# Altium PCB Layout.PcbDoc
Units mil, origin at the board's own origin, x right, y up, seen from the top; angles counter-clockwise.
Board outline 3000 x 3500 mil, 4 copper layers (Top Layer, Int1 (GND), Int2 (GND), Bottom Layer), stack 43.712 mil thick; 44 components, 33 nets, 161 pads, 35 vias.
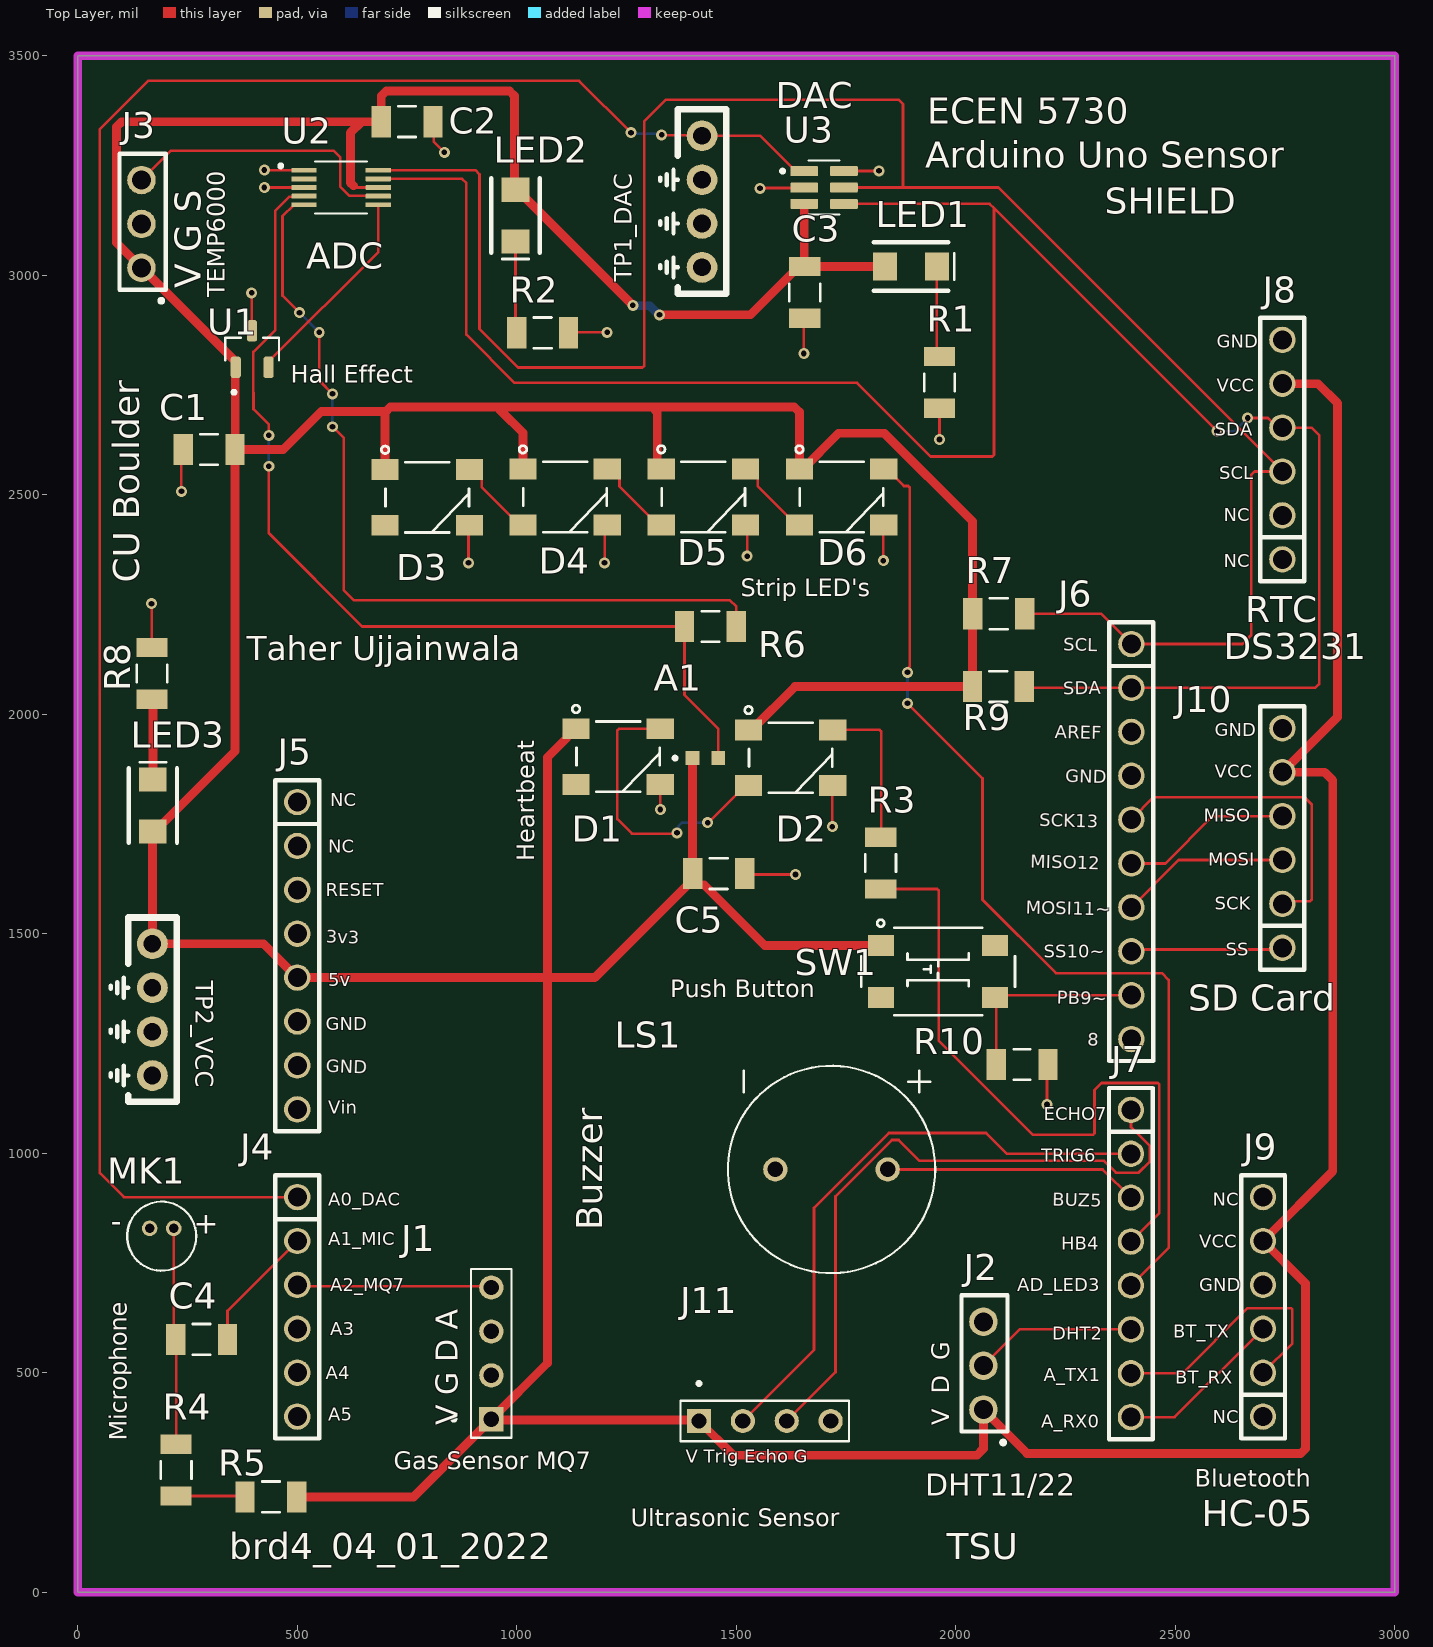
[diagram p0: Top Layer view]
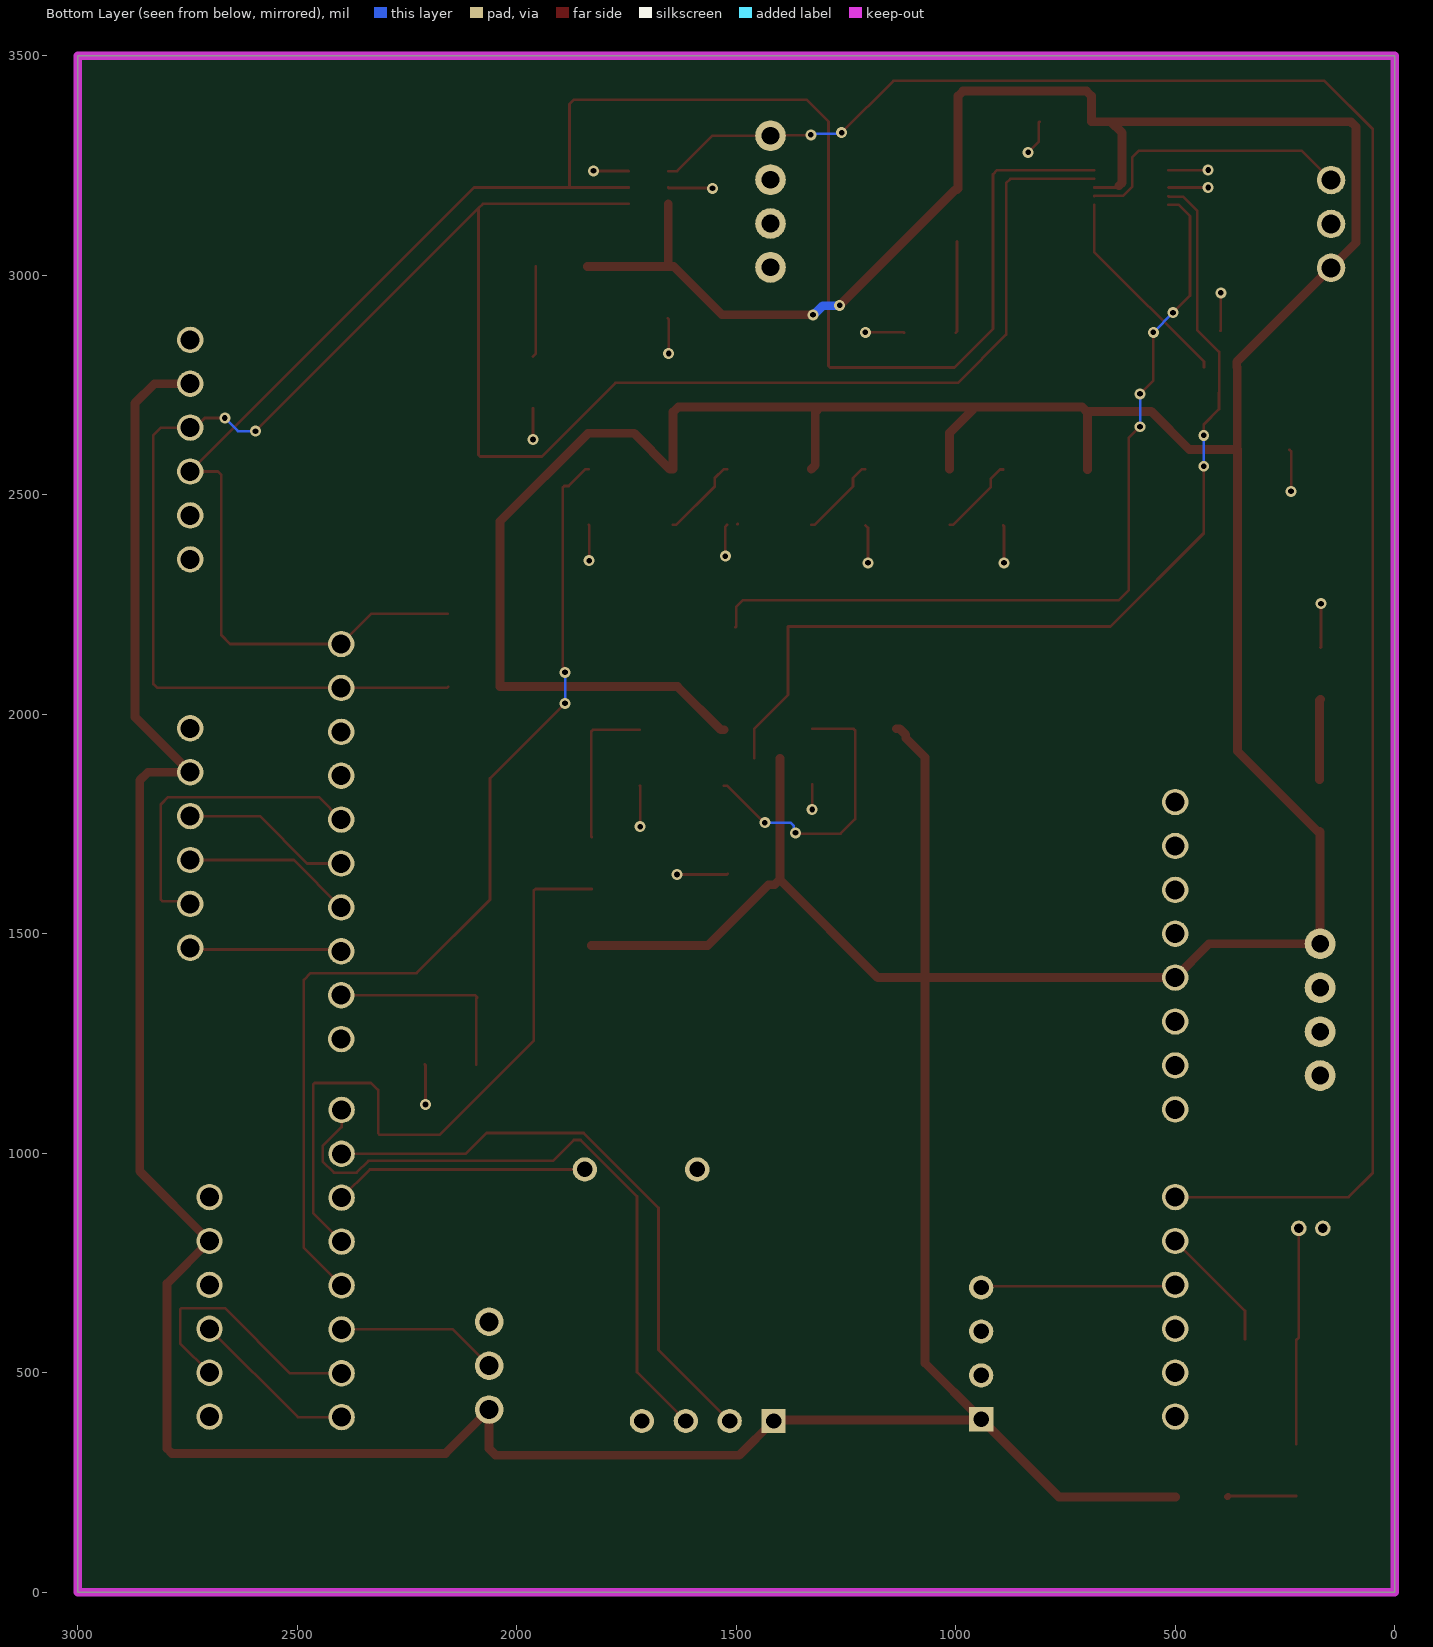
[diagram p1: Bottom Layer view, seen from below]
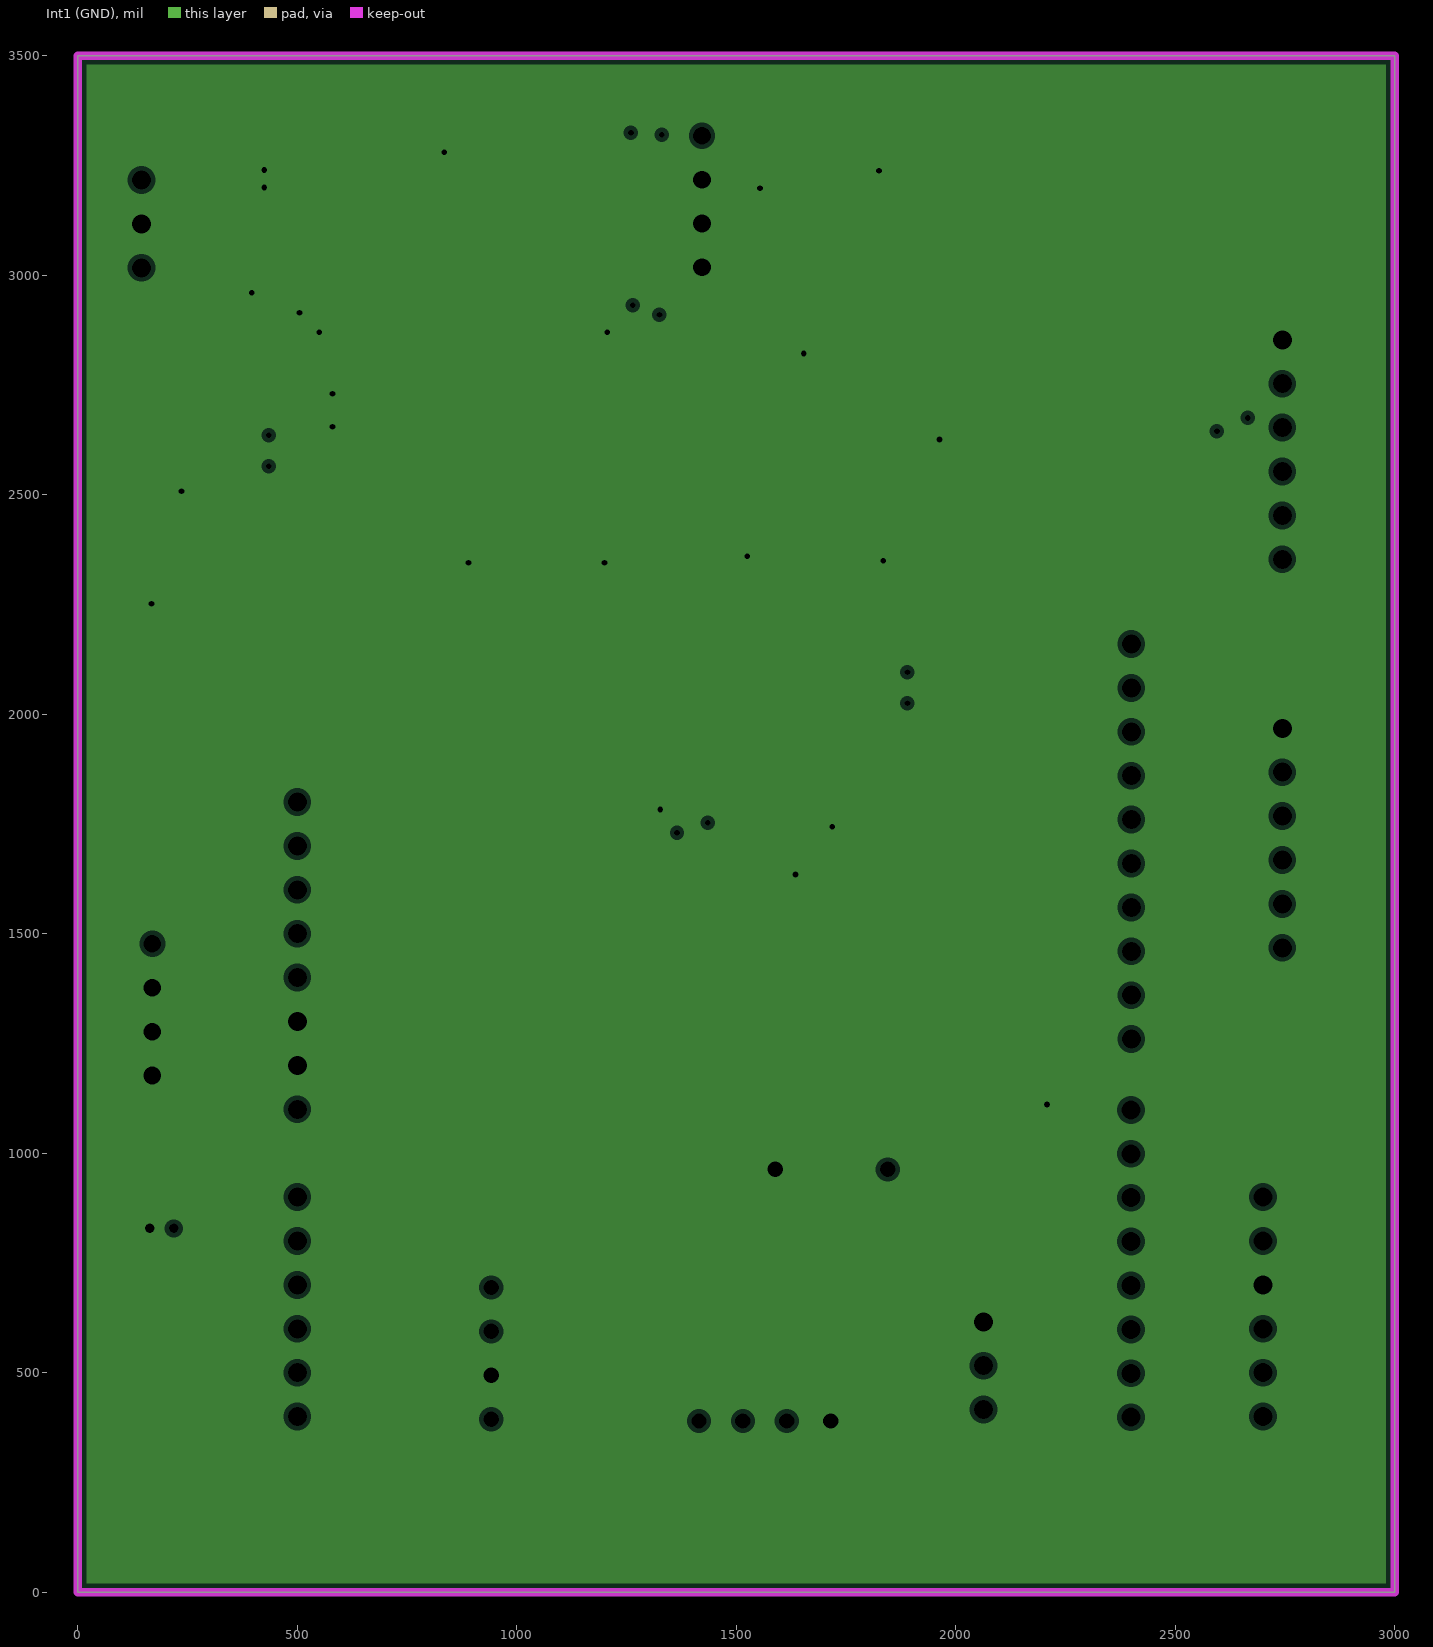
[diagram p2: Int1 (GND), clearances drawn from the general rule]
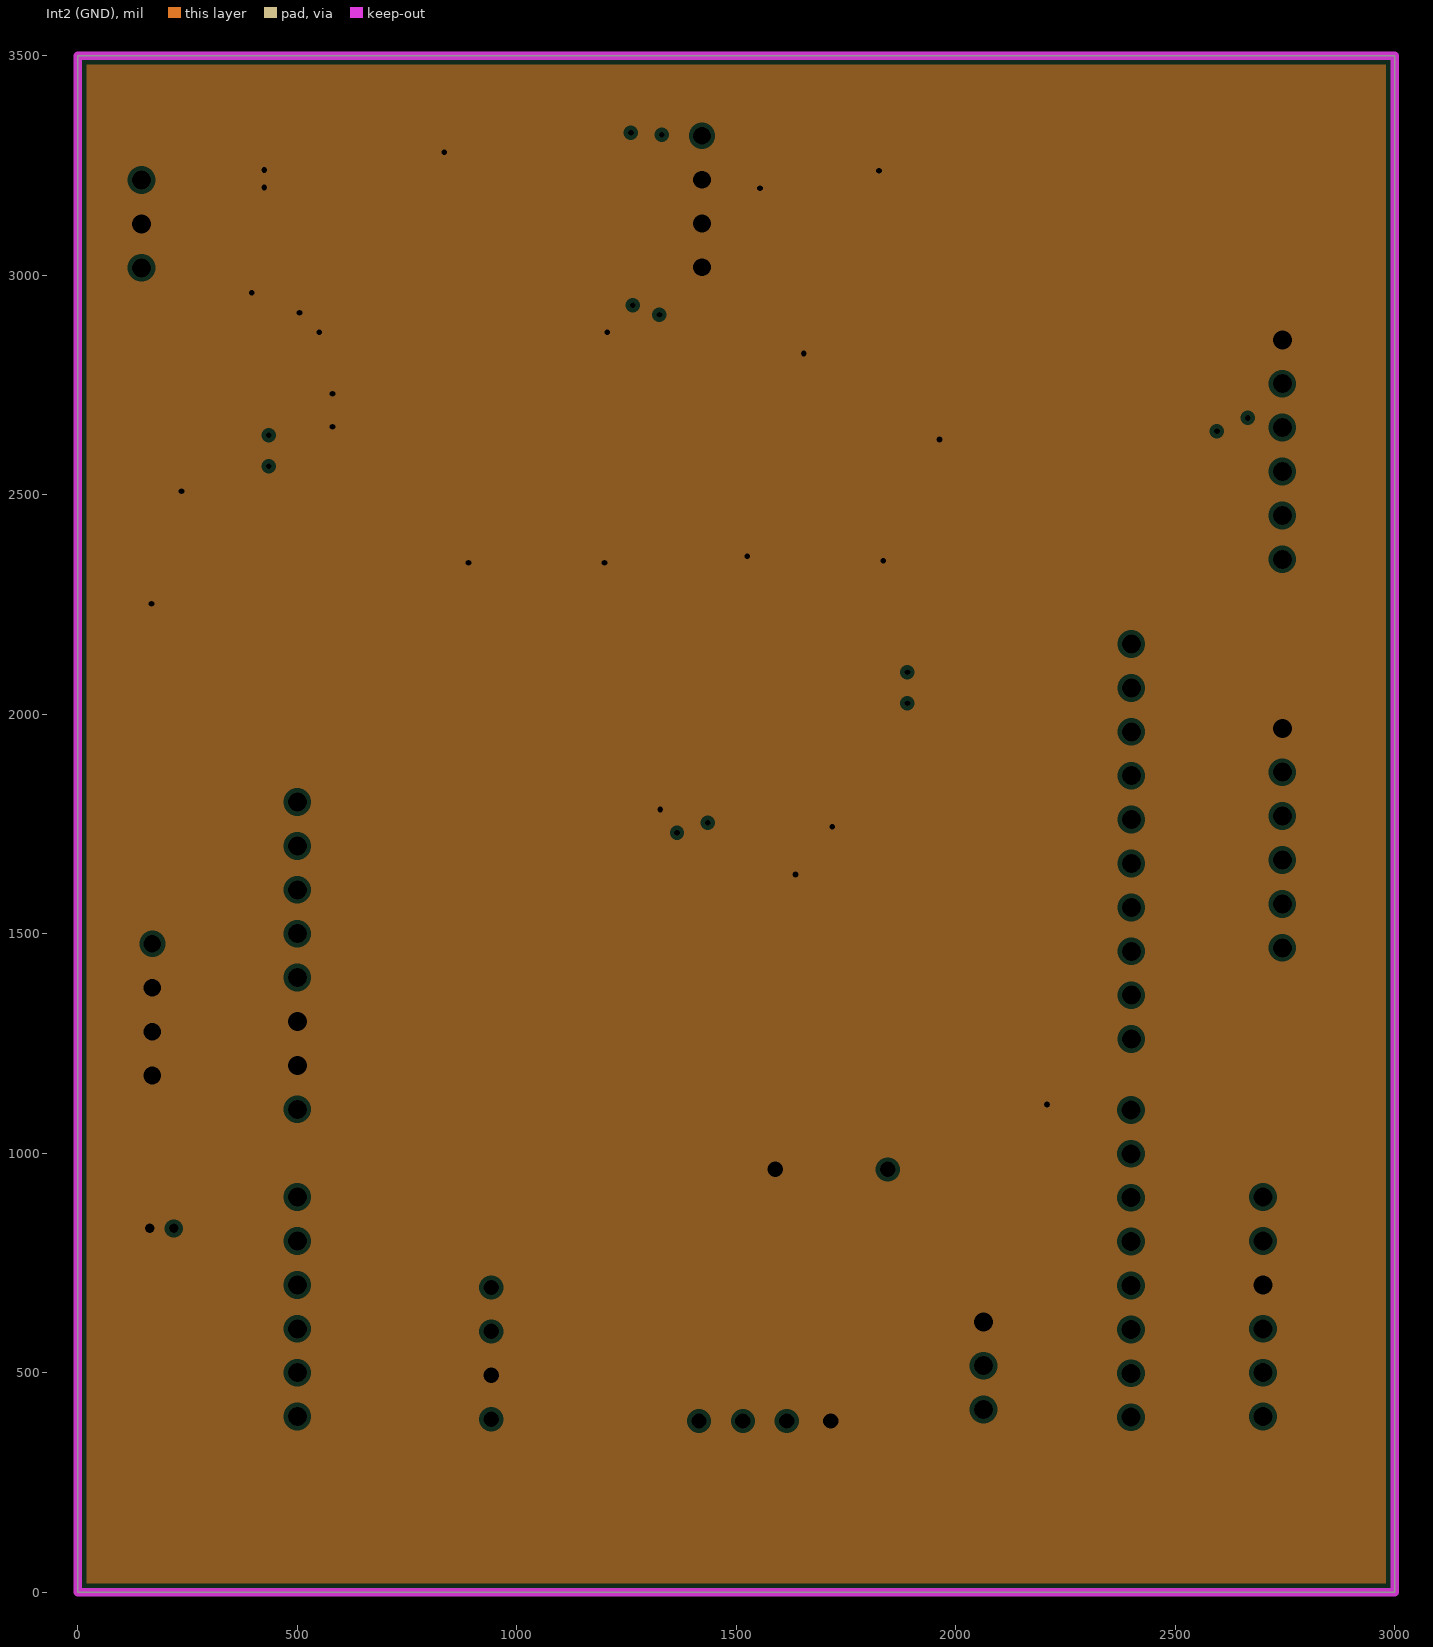
[diagram p3: Int2 (GND), clearances drawn from the general rule]
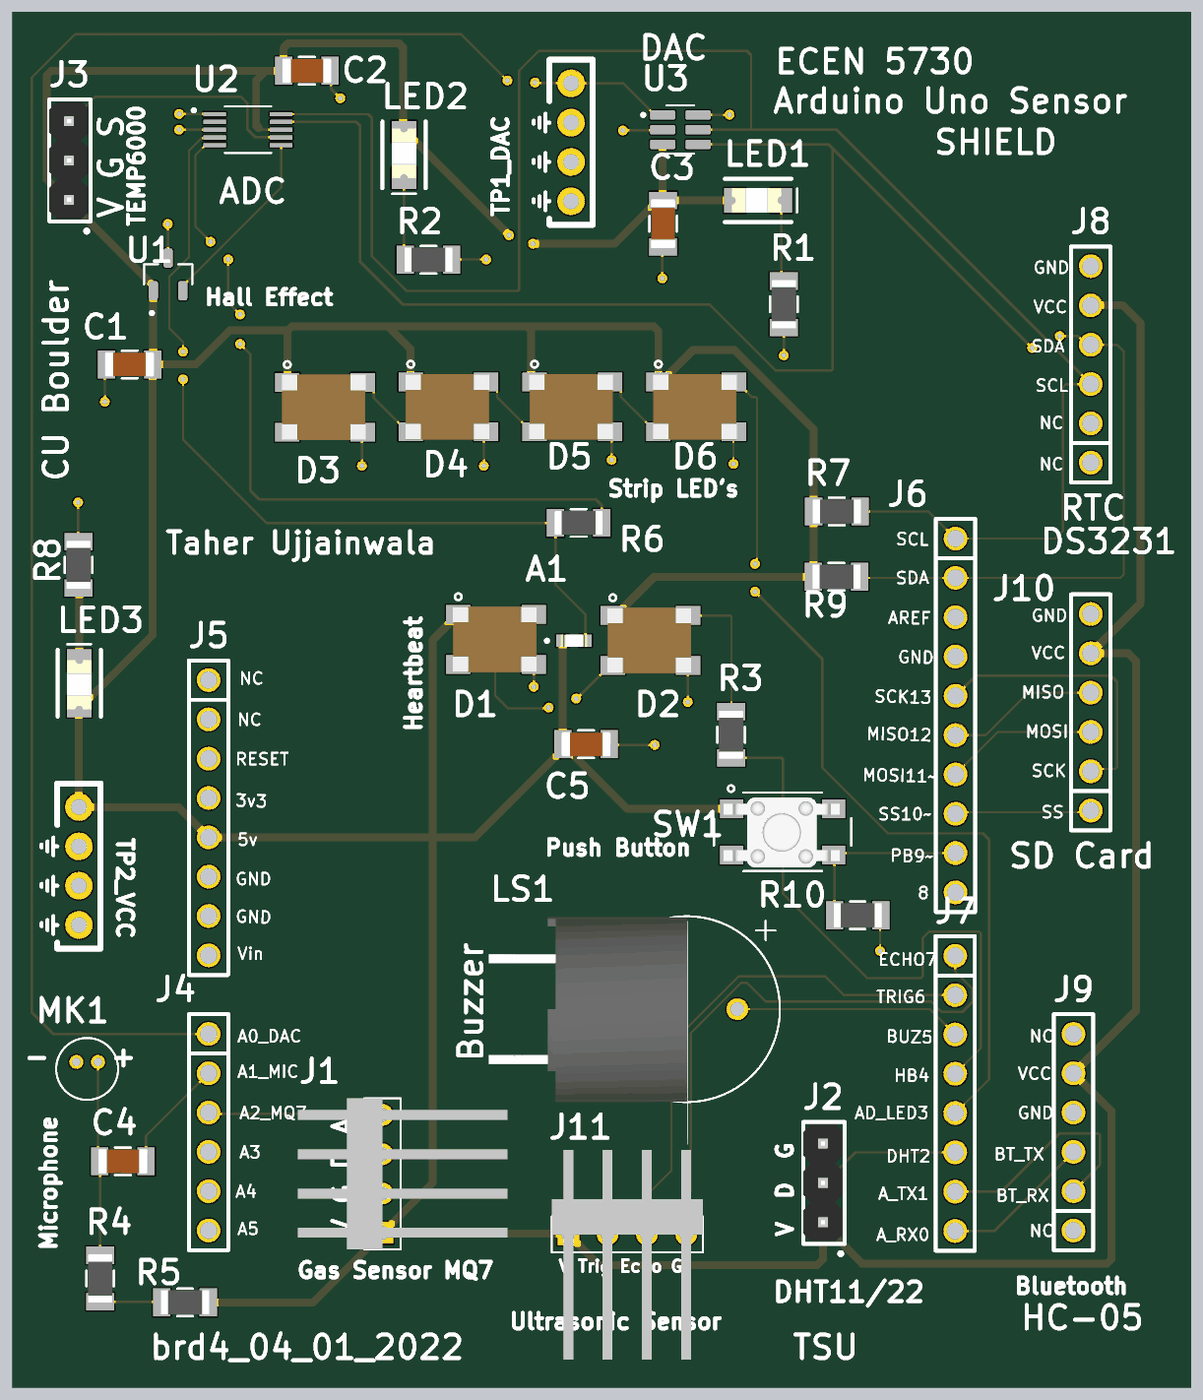
[diagram p4: 3D render of the assembled board from above, using the file's embedded part models]

## Layer stack, top to bottom
Top Solder: solder mask 1, SM-001, Dk 4
Top Layer: signal copper 1.378
Dielectric 2: prepreg 5.1, PP-017, Dk 4.3
Int1 (GND): plane copper 1.378, net GND
Dielectric 3: core 28, Core-039, Dk 4.8
Int2 (GND): plane copper 1.378, net GND
Dielectric 4: prepreg 5.1, PP-017, Dk 4.3
Bottom Layer: signal copper 1.378
Bottom Solder: solder mask 1, SM-001, Dk 4

## Board outline
0,0 3000,0 3000,3500 0,3500

## Design rules (kind name [scope] priority, off if disabled: settings)
Clearance [All] p1: gap=10 ignorepadtopadclearanceinfootprint=FALSE except(0: Arc-Hole Track-Hole SMDPad-Hole THPad-Hole Via-Hole Fill-Hole Poly-Hole Region-Hole Text-Hole)
PlaneClearance [All] p1: clearance=10
PlaneConnect [All] p1: planeconnectstyle=Direct reliefexpansion=20 reliefentries=4 reliefconductorwidth=10 reliefairgap=10
PolygonConnect [All] p1: connectstyle=Direct reliefconductorwidth=10 reliefentries=4 polygonreliefangle="90 Angle" airgapwidth=10
RoutingVias [All] p1: holewidth=13 width=25 viastyle="Through Hole" minholewidth=13 minwidth=25 maxholewidth=60 maxwidth=80
SolderMaskExpansion [All] p1: expansion=4 istentingtop=FALSE
UnRoutedNet [All] p1: checkbadconnections=TRUE
Width "Power Trace" [InNet('VCC_5V')] p1: maxlimit=100 minlimit=20 preferedwidth=20 minimp=50.000000 maximp=50.000000 favimp=50.000000
Width [All] p2: maxlimit=100 minlimit=6 preferedwidth=6 minimp=50.000000 maximp=50.000000 favimp=50.000000
27 further rules are at their usual default settings.

## Components (designator, comment, footprint, x,y, rotation, side; value= is the part's Value field where it differs from the comment)
A1 "ALS-PT19-315C/L177/TR8" XDCR_ALS-PT19-315C/L177/TR8 1429.53,1900 r0 top
C1 "22uF" 1206_Passive_Capacitor 299,2603 r180 top
C2 "22uF" 1206_Passive_Capacitor 750,3350 r0 top
C3 "22uF" 1206_Passive_Capacitor 1656,2961 r270 top
C4 "1uF" 1206_Passive_Capacitor 282,576 r180 top
C5 "22uF" 1206_Passive_Capacitor 1460,1637 r180 top
D1 "IN-PI55QATPRPGPBPW" SERIAL_LED 1231,1903.5 r0 top
D2 "IN-PI55QATPRPGPBPW" SERIAL_LED 1624,1901 r0 top
D3 "IN-PI55QATPRPGPBPW" SERIAL_LED 796,2494 r0 top
D4 "IN-PI55QATPRPGPBPW" SERIAL_LED 1110,2495 r0 top
D5 "IN-PI55QATPRPGPBPW" SERIAL_LED 1425,2495 r0 top
D6 "IN-PI55QATPRPGPBPW" SERIAL_LED 1740,2495 r0 top
J1 "87220-4" TE_87220-4 942,544 r90 top locked
J2 "3 PIN" 3_PIN_100mil 2063,416 r90 top
J3 "3 PIN" 3_PIN_100mil 145,3017 r90 top locked
J4 "PPTC061LFBN-RC" 6_PIN_ARDUINO_100mil 500,900 r270 top locked value=Male
J5 "PPTC081LFBN-RC" 8_PIN_ARDUINO_100MIL 500,1800 r270 top locked value=Male
J6 "PPTC101LFBN-RC" 10_PIN_ARDUINO_100MIL 2400,2160 r270 top locked value=Male
J7 "PPTC081LFBN-RC" 8_PIN_ARDUINO_100MIL 2399.12,1098.68 r270 top locked value=Male
J8 "PPTC061LFBN-RC" 6_PIN_ARDUINO_100mil 2744,2353 r90 top locked value=Male
J9 "PPTC061LFBN-RC" 6_PIN_ARDUINO_100mil 2700,400 r90 top locked value=Male
J10 "PPTC061LFBN-RC" 6_PIN_ARDUINO_100mil 2744,1468 r90 top locked value=Male
J11 "87220-4" TE_87220-4 1565,390 r0 top locked
LED1 "LTST-C150CKT" LED 1898,3020 r270 top value=Red
LED2 "LTST-C150CKT" LED 997,3136 r180 top value=Red
LED3 "LTST-C150CKT" LED 171,1792 r0 top value=Red
LS1 "AT-1224-TWT-5V-2-R" XDCR_AT-1224-TWT-5V-2-R 1716.95,963 r270 top
MK1 "CMEJ-0415-42-P" MIC_CMEJ-0415-42-P 191,811 r180 top
R1 "1k" 1206_Passive_Resitor 1963,2756 r270 top value="1K Ohm"
R2 "1k" 1206_Passive_Resitor 1059,2869 r0 top value="1K Ohm"
R3 "1k" 1206_Passive_Resitor 1829,1661 r270 top value="1K Ohm"
R4 "1k" 1206_Passive_Resitor 224,278 r90 top value="1K Ohm"
R5 "1k" 1206_Passive_Resitor 440,217 r180 top value="1K Ohm"
R6 "10k" 1206_Passive_Resitor 1441,2200 r0 top value=10KOhm
R7 "1k" 1206_Passive_Resitor 2098,2229 r0 top value="1K Ohm"
R8 "1k" 1206_Passive_Resitor 169,2093 r90 top value="1K Ohm"
R9 "1k" 1206_Passive_Resitor 2097,2063 r0 top value="1K Ohm"
R10 "10k" 1206_Passive_Resitor 2151,1202 r0 top value=10KOhm
SW1 "TL3305AF160QG" Switch_JLC 1960,1414 r0 top
TP1_DAC "10x Probe TP" TP10x_Probe 1422,3168 r270 top (schematic designator TP1)
TP2_VCC "10x Probe TP" TP10x_Probe 170,1327 r270 top locked (schematic designator TP2)
U1 "DRV5053RAQDBZT" SOT95P237X112-3N 397,2832 r90 top
U2 "ADS1115IDGSR" SOP50P490X110-10N 600,3200 r0 top
U3 "MCP4725A0T-E/CH" SOT95P270X145-6N 1700,3200 r0 top

## Footprints (in the part's own frame and the unit in brackets; to place one, negate y for a bottom-side part, rotate by r counter-clockwise, add the part's x,y. Pads: shape width x height; smd on the part's side, far side on the other; paste and mask are expansions set on the pad)
3_PIN_100mil [mm]
  round 1.65 hole 1.1: 1(0,0) 2(2.54,0) 3(5.08,0)
  silkscreen extent -2,-1.4 6.6,1.27, body extent -1.14,-1.27 6.48,1.27, height 8.38
6_PIN_ARDUINO_100mil [mil]
  round 60 hole 43.31: 1(0,0) 2(100,0) 3(200,0) 4(300,0) 5(400,0) 6(500,0)
  silkscreen extent -50,-50 550,50
8_PIN_ARDUINO_100MIL [mil]
  round 60 hole 43.31: 1(0,0) 2(100,0) 3(200,0) 4(300,0) 5(400,0) 6(500,0) 7(600,0) 8(700,0)
  silkscreen extent -50,-50 750,50
10_PIN_ARDUINO_100MIL [mil]
  round 60 hole 43.31: 1(0,0) 2(100,0) 3(200,0) 4(300,0) 5(400,0) 6(500,0) 7(600,0) 8(700,0) 9(800,0) 10(900,0)
  silkscreen extent -50,-50 950,50
1206_Passive_Capacitor [mil]
  rect 44x71 smd: 1(-59,0) 2(59,0)
  silkscreen extent -20,-35 20,35, body extent -63,-31 63,32, height 50
1206_Passive_Resitor [mil]
  rect 44x71 smd: 1(-59,0) 2(59,0)
  silkscreen extent -20,-35 20,35, body extent -61,-31 61,31, height 26
LED [mil]
  rect 63x55 smd: 1(0,59) 2(0,-59)
  silkscreen extent -55,-85 55,99, body extent -31,-67 32,59, height 43
MIC_CMEJ-0415-42-P [mm]
  round 0.9 hole 0.55: N(0.7,-0.45) P(-0.7,-0.45)
  silkscreen extent -2,-2 2,2
SERIAL_LED [mil] "Footprint for serial LED"
  rect 62x47.5 smd: 1(-96,63.5) 2(-96,-63.5) 3(96,-63.5) 4(96,63.5)
  silkscreen extent -105,-80 95,117, body extent -109,-84 103,84, height 63
SOP50P490X110-10N [mm]
  rrect25% 1.47x0.28 smd: 1(-2.15,1) 2(-2.15,0.5) 3(-2.15,0) 4(-2.15,-0.5) 5(-2.15,-1) 6(2.15,-1) 7(2.15,-0.5) 8(2.15,0) 9(2.15,0.5) 10(2.15,1)
  silkscreen extent -3.6,-1.5 1.5,1.5
SOT95P237X112-3N [mm]
  rrect50% 1.24x0.59 smd: 1(-1.055,0.95) 2(-1.055,-0.95) 3(1.055,0)
  silkscreen extent -2.6,-1.56 0.65,1.56
SOT95P270X145-6N [mm]
  rrect25% 1.61x0.59 smd: 1(-1.145,0.95) 2(-1.145,0) 3(-1.145,-0.95) 4(1.145,-0.95) 5(1.145,0) 6(1.145,0.95)
  silkscreen extent -2.5,-1.56 0.9,1.56
Switch_JLC [mm]
  rect 1.5x1.2 smd: 1(-3.3,1.5) 2(3.3,1.5) 3(-3.3,-1.5) 4(3.3,-1.5)
  silkscreen extent -4.44,-2.54 4.45,3, body extent -3.8,-2.29 3.7,2.21, height 3.7
TE_87220-4 [mm]
  rect 1.398x1.398 hole 0.89: 1(-3.81,0)
  round 1.398 hole 0.89: 2(-1.27,0) 3(1.27,0) 4(3.81,0)
  silkscreen extent -4.88,-1.17 4.88,2.27, body extent -4.88,-8.08 4.88,5.46, height 1.17
TP10x_Probe [mil] "Small Probs footprint"
  round 70 hole 40: 1(-150,0) 2(-50,0) 2(50,0) 2(150,0)
  silkscreen extent -210,-95 210,55
XDCR_ALS-PT19-315C/L177/TR8 [mm]
  rect 0.8x0.8 smd: 1(-0.75,0) 2(0.75,0)
  silkscreen extent -1.85,-0.1 -1.65,0.1, body extent -0.85,-0.4 0.85,0.4, height 0.6
XDCR_AT-1224-TWT-5V-2-R [mm]
  round 1.408 hole 0.9: N(0,-3.25) P(0,3.25)
  silkscreen extent -6,-6 6,6, body extent -6,-12.8 8.75,0.05, height 6

## Part data
A1: "Phototransistors 630nm 2-SMD, No Lead", Package=None, Availability=Good, Check_prices=https://www.snapeda.com/parts/ALS-PT19-315C/L177/TR8/Everlight%20Electronics%20Co%20Ltd/view-part/226235/?ref=eda, MF=Everlight, MP=ALS-PT19-315C/L177/TR8, Price=None, Purchase-URL=https://pricing.snapeda.com/search/part/ALS-PT19-315C/L177/TR8/?ref=eda, SnapEDA_Link=https://www.snapeda.com/parts/ALS-PT19-315C/L177/TR8/Everlight%20Electronics%20Co%20Ltd/view-part/226235/?ref=snap
C1 C2 C3 C5: library part C_22uF_1206, "22µF ±20% 16V Ceramic Capacitor X5R 1206 (3216 Metric)", MFR Part #=CL31A226KPHNNNE, Digikey Link=https://www.digikey.com/product-detail/en/CL31A226MOCLNNC/1276-2728-1-ND/3890814/?itemSeq=304982363, Digikey Part=1276-2728-1-ND, Type=Extended
C4: library part C_1uF_1206, "1µF ±20% 16V Ceramic Capacitor X7R 1206 (3216 Metric)", MFR Part #=CL31B105KBHNNNE, Digikey Link=https://www.digikey.com/product-detail/en/C1206C105M4RACTU/399-8150-1-ND/3471873/?itemSeq=304982366, Digikey Part=399-8150-1-ND, Type=Basic
D1 D2 D3 D4 D5 D6: library part LED_Smart_5050, "Digital Series Cascade LED", DigiKey=https://www.digikey.com/product-detail/en/inolux/IN-PI55QATPRPGPBPW-60/1830-1209-1-ND/9681289
J1 J11: "Conn Unshrouded Header HDR 4 POS 2.54mm Solder ST Thru-Hole Carton", Package=None, Availability=Warning, Centerline_Pitch="2.54 mm[.1 in]", Check_prices=https://www.snapeda.com/parts/87220-4/TE%20Connectivity%20AMP%20Connectors/view-part/498541/?ref=eda, EU_RoHS_Compliance=Compliant, MF="TE Connectivity", MP=87220-4, Number_of_Positions=4, Price=None, Product_Type=Connector, Purchase-URL=https://pricing.snapeda.com/search/part/87220-4/?ref=eda, SnapEDA_Link=https://www.snapeda.com/parts/87220-4/TE%20Connectivity%20AMP%20Connectors/view-part/498541/?ref=snap
J2 J3: library part J_3_PIN_HEADER, "3 2.54mm Straight 1 Header，Breakaway Through Hole Pin Header & Female Header ROHS", LCSC Part#=C49257, Datasheet=https://datasheet.lcsc.com/lcsc/1811132313_BOOMELE-Boom-Precision-Elec-C49257_C49257.pdf, MFR Part #=C49257, Type=Extended
J4 J8 J9 J10: library part JM_6_PIN_MALE_ARDUINO, "6 Position Header Connector 0.100\" (2.54mm) Through Hole Tin", LCSC Part#=DNP, Digikey Link=https://www.digikey.com/product-detail/en/PPTC061LFBN-RC/S7004-ND/810145/?itemSeq=304982353, Digikey Part=S7004-ND
J5 J7: library part JM_8_PIN_MALE_ARDUINO, "8 Position Header Connector 0.100\" (2.54mm) Through Hole Tin", LCSC Part#=DNP, Digikey Link=https://www.digikey.com/product-detail/en/PPTC081LFBN-RC/S7006-ND/810147/?itemSeq=304982354, Digikey Part=S7006-ND
J6: library part JM_10_PIN_MALE_ARDUINO, "10 Position Header Connector 0.100\" (2.54mm) Through Hole Tin", LCSC Part#=DNP, Digikey Link=https://www.digikey.com/product-detail/en/PPTC101LFBN-RC/S7008-ND/810149/?itemSeq=304982352, Digikey Part=S7008-ND
LED1 LED2 LED3: library part LED_1206, "Red 638nm LED Indication - Discrete 1.8V 1206 (3216 Metric)", Digikey Link=https://www.digikey.com/product-detail/en/LTST-C150CKT/160-1167-1-ND/269239/?itemSeq=304982368, Digikey Part=160-1167-1-ND
LS1: "AUDIO TRANSDUCER 5 VP-P 87 DB 2400 HZ", Package="PUI Audio,", Availability="In Stock", Check_prices=https://www.snapeda.com/parts/AT-1224-TWT-5V-2-R/PUI%20Audio,%20Inc./view-part/453710/?ref=eda, MF="PUI Audio,", MP=AT-1224-TWT-5V-2-R, Price=None, Purchase-URL=https://pricing.snapeda.com/search/part/AT-1224-TWT-5V-2-R/?ref=eda, SnapEDA_Link=https://www.snapeda.com/parts/AT-1224-TWT-5V-2-R/PUI%20Audio,%20Inc./view-part/453710/?ref=snap
MK1: "4.0 Ð¼Ð¼, Ð²ÑÐµÐ½Ð°Ð¿Ñ€Ð°Ð²Ð»ÐµÐ½Ð½Ñ‹Ð¹, Ð¼Ð¾Ð½Ñ‚Ð°Ð¶ Ð½Ð° Ð¿ÐµÑ‡Ð°Ñ‚Ð½Ð¾Ð¹ Ð¿Ð»Ð°Ñ‚Ðµ, 2.0 Ð’ Ð¿Ð¾ÑÑ‚Ð¾ÑÐ½Ð½Ð¾Ð³Ð¾ Ñ‚Ð¾ÐºÐ°, Ð­Ð»ÐµÐºÑ€ÐµÑ‚-ÐºÐ¾Ð½Ð´ÐµÐ½ÑÐ°Ñ‚Ð¾Ñ€Ð½Ñ‹Ð¹ Ð¼Ð¸ÐºÑ€Ð¾Ñ„Ð¾Ð½", Package="CUI Inc.", CUI_purchase_URL=https://www.cuidevices.com/product/audio/microphones/electret-condenser-microphones/cmej-0415-42-p?utm_source=snapeda.com&utm_medium=referral&utm_campaign=snapedaBOM, Digi-Key_Part_Number=102-6542-ND, Digi-Key_Purchase_URL=https://www.digikey.com/product-detail/en/cui-devices/CMEJ-0415-42-P/102-6542-ND/10253451?utm_source=snapeda&utm_medium=aggregator&utm_campaign=symbol, MF="CUI Devices", MP=CMEJ-0415-42-P, SnapEDA_Link=https://www.snapeda.com/parts/CMEJ-0415-42-P/CUI%20Devices/view-part/3625885/?ref=snap
R1 R2 R3 R4 R5 R7 R8 R9: library part R_1K_1206, "1 kOhms ±1% 0.5W, 1/2W Chip Resistor 1206 (3216 Metric) Anti-Sulfur, Moisture Resistant Thin Film", MFR Part #=1206W4F1001T5, Digikey Link=https://www.digikey.com/product-detail/en/RNCP1206FTD1K00/RNCP1206FTD1K00CT-ND/2240675/?itemSeq=304982373, Digikey Part=RNCP1206FTD1K00CT-ND
R6: library part R_10KOhm_1206, "10 kOhms ±5% 0.25W, 1/4W Chip Resistor 1206 (3216 Metric) Automotive AEC-Q200 Thick Film", Digikey Link=https://www.digikey.com/product-detail/en/RMCF1206JT300R/RMCF1206JT300RCT-ND/1942776/?itemSeq=304982374, Digikey Part=RMCF1206JT300RCT-ND
R10: library part R_10KOhm_1206, "10 kOhms ±5% 0.25W, 1/4W Chip Resistor 1206 (3216 Metric) Automotive AEC-Q200 Thick Film", LCSC Part#=C17902, Digikey Link=https://www.digikey.com/product-detail/en/RMCF1206JT300R/RMCF1206JT300RCT-ND/1942776/?itemSeq=304982374, Digikey Part=RMCF1206JT300RCT-ND, Type=Basic
SW1: library part SW_Push_Button_JLC, "Tactile Switch SPST-NO Top Actuated Surface Mount", LCSC Part#=C174049, MFR Part #=C174049, Type=Extended
TP1_DAC TP2_VCC: library part TP_10x_Probe, "Test Point 300 mil centers"
U1: "SENSOR LINEAR ANALOG SOT23-3", Package=None, Availability=Unavailable, MP=DRV5053RAQDBZT, Price=None
U2: "16-Bit 860SPS 4-Ch Delta-Sigma ADC With PGA, Oscillator, Vref, Comparator, and I2C 10-VSSOP -40 to 125", Package="VSSOP-10 Texas Instruments", Availability=Good, DigiKey-Purchase-URL=https://snapeda.com/shop?store=DigiKey&id=45903, MF="Texas Instruments", Mouser-Purchase-URL=https://snapeda.com/shop?store=Mouser&id=45903, MP=ADS1115IDGSR, Price=None, SnapEDA_Link=https://www.snapeda.com/parts/ADS1115IDGSR/Texas%20Instruments/view-part/45903/?ref=snap, Texas_Instruments-Purchase-URL=https://snapeda.com/shop?store=Texas+Instruments&id=45903
U3: "12 Bit Digital to Analog Converter 1 SOT-23-6", Package="SOT-23-6 Microchip", Availability=Unavailable, MF=Microchip, MP=MCP4725A0T-E/CH, Price=None, SnapEDA_Link=https://www.snapeda.com/parts/MCP4725A0T-E/CH/Microchip/view-part/109888/?ref=snap

## Via types
v1: diameter 25, hole 13, Top Layer to Bottom Layer, 35 vias

## Nets (pads, with @x,y where several pads share a name; then routed paths per layer and width w, separated by ;. In a path a pad name is that pad's centre, name@x,y a point inside that pad or via, vN(x,y) a via of type N, cw(c..) or ccw(c..) an arc to the next point about the centre after c; other vN are vias at no path point)
AM_LIGHT_AIN3: J3.3 U2.7 | length 649.6
  Top Layer w6: J3.3 212,3284 582.49,3284 598,3268.49 598,3201.47 618.47,3181 683.96,3181 U2.7
BT_RX: J7.7 J9.2 | length 602
  Top Layer w6: J7.7 2516.21,498.68 2664.52,647 2763.49,647 2767,643.49 2767,567 J9.2
BT_TX: J7.8 J9.3 | length 384.3
  Top Layer w6: J7.8 2498.68,398.68 J9.3
BUZ_PWM: J7.3 LS1.P | length 580.9
  Top Layer w6: LS1.P 2334.8,963 J7.3
D10_SS: J6.8 J10.1 | length 347.3
  Top Layer w6: J6.8 2404,1464 2740,1464 J10.1
D11_MOSI: J6.7 J10.3 | length 388.7
  Top Layer w6: J6.7 2508,1668 J10.3
D12_MISO: J6.6 J10.4 | length 388.7
  Top Layer w6: J6.6 2477.37,1660 2585.37,1768 J10.4
D13_SCK: J6.5 J10.2 | length 726.9
  Top Layer w6: J6.5 2451,1811 2795,1811 2811,1795 2811,1578 2807,1574 2750,1574 J10.2
DAC_OP_A0: J4.1 TP1_DAC.1 U3.1 | length 4586.3
  Top Layer w6: J4.1 105,900 50,955 50,3332.81 160.19,3443 1142,3443 v1(1260,3325) ; v1(1330,3320) 1331,3319 1421,3319 TP1_DAC.1 1554.24,3318 1634.84,3237.4 U3.1
  Bottom Layer w6: v1(1260,3325) 1262.5,3322.5 1327.5,3322.5 v1(1330,3320)
ECHO: J7.1 J11.3 | length 1503.8
  Top Layer w6: J11.3 1726.21,501.21 1726.21,901.89 1854.32,1030 1870,1030 1917.32,982.68 2337.75,982.68 2364.75,955.68 2416.93,955.68 2442.12,980.87 2442.12,1016.5 2399.12,1059.5 J7.1
GAS_AO: J1.4 J4.3 | length 444.5
  Top Layer w6: J4.3 503,697 939,697 J1.4
GND: C1.2 C2.2 C3.2 C5.1 D1.3 D2.3 D3.3 D4.3 D5.3 D6.3 J1.2 J2.3 J3.2 J5.6 J5.7 J8.6 J9.4 J10.6 J11.4 LS1.N MK1.N R1.2 R2.2 R6.2 R8.2 R10.2 TP1_DAC.2 TP2_VCC.2 U1.3 U2.1 U2.3 U2.5 U3.2 U3.6 | length 3584.9
  Top Layer w6: v1(168,2252) 168,2153 R8.2 ; v1(236,2508) 236,2599 C1.2 ; v1(396,2960) 396.5,2959.5 396.5,2874.05 U1.3 ; v1(425,3200) U2.3 ; v1(425,3240) 425.32,3239.69 515.04,3239.69 U2.1 ; v1(505,2915) 466.3,2953.7 466.3,3135 491.93,3160.63 U2.5 ; v1(550,2870) 550,2760 v1(580,2730) ; v1(580,2655) 606.08,2628.92 606.08,2282.44 628.51,2260 1485,2260 1500,2245 R6.2 R6.2@1502,2198 ; C2.2 811,3348 811,3304 v1(835,3280) ; v1(890,2345) 890,2428.5 D3.3 ; R2.2 1119,2870 v1(1206,2870) ; v1(1200,2345) 1200,2424.5 D4.3@1205.5,2430 ; v1(1327,1783) D1.3 ; D5.3@1497,2433.5 D5.3@1498,2432.5 ; C5.1 1521,1635 v1(1635,1635) ; D5.3 1525,2427.5 v1(1525,2360) ; v1(1554,3198) 1555,3199 1653.92,3199 U3.2 ; v1(1654,2822) 1654,2900 C3.2 ; v1(1719,1744) 1719,1836.5 D2.3 ; U3.6 1745.38,3237.7 1824.7,3237.7 v1(1825,3238) ; v1(1835,2350) 1835,2430.5 D6.3 ; v1(1963,2626) R1.2 ; v1(2208,1111) 2208,1200 R10.2
  Bottom Layer w6: v1(505,2915) v1(550,2870) ; v1(580,2655) v1(580,2730)
HB_DS_A0: A1.2 R6.1 U2.4 | length 2216.1
  Top Layer w6: v1(435,2565) 435,2412.37 647.37,2200 R6.1 1382,2044 1459.06,1966.94 A1.2 ; v1(435,2635.5) 435,2660 400.14,2694.86 400.14,2732.39 400,2732.53 400,2825.54 450,2875.54 450,3147.3 481.84,3179.14 514.18,3179.14 U2.4
  Bottom Layer w6: v1(435,2565) v1(435,2635.5)
HFS_AIN2: U1.2 U2.6 | length 473.8
  Top Layer w6: U1.2 434.4,2803.26 684.65,3053.5 U2.6
LED's: D6.4 J7.5 | length 2319.8
  Top Layer w6: D6.4 1843.25,2558.5 1881.75,2520 1891.49,2520 1895,2516.49 1895,2108.51 1893.64,2107.15 1893.64,2099.14 v1(1890,2095.5) ; v1(1890,2025) 2061.08,1853.92 2061.08,1577.44 2228.51,1410 2470,1410 2485,1395 2485,784.57 J7.5
  Bottom Layer w6: v1(1890,2025) v1(1890,2095.5)
MIC_OP: C4.1 J4.2 | length 289.9
  Top Layer w6: C4.1 341,641 J4.2
NetC4_2: C4.2 MK1.P R4.2 | length 494
  Top Layer w6: MK1.P 218.56,580.44 C4.2 224,575 R4.2
NetD1_4: D1.4 D2.2 | length 666.6
  Top Layer w6: D1.4 1232.51,1967 1229,1963.49 1229,1761 1262,1728 1363,1728 v1(1365,1730) ; v1(1435,1753) 1436.25,1753 1520.75,1837.5 D2.2
  Bottom Layer w6: v1(1365,1730) 1368.64,1733.64 1368.64,1744.99 1376.65,1753 v1(1435,1753)
NetD2_4: D2.4 R3.1 | length 352.9
  Top Layer w6: D2.4 1826.49,1964.5 1830,1960.99 1830,1721 R3.1
NetD3_4: D3.4 D4.2 | length 185
  Top Layer w6: D3.4 899.25,2557.5 920,2536.75 920,2518.25 1006.75,2431.5 D4.2
NetD4_4: D4.4 D5.2 | length 186.4
  Top Layer w6: D4.4 1213.25,2558.5 1234,2537.75 1234,2519.25 1321.75,2431.5 D5.2
NetD5_4: D5.4 D6.2 | length 186.4
  Top Layer w6: D5.4 1528.25,2558.5 1549,2537.75 1549,2519.25 1636.75,2431.5 D6.2
NetLED1_1: LED1.1 R1.1 | length 207.5
  Top Layer w6: LED1.1 1957,2821 R1.1
NetLED2_1: LED2.1 R2.1 | length 209.2
  Top Layer w6: LED2.1 997,2872 R2.1
NetLED3_1: LED3.1 R8.1 | length 183.8
  Top Layer w20: R8.1 171,2032 LED3.1
NetR4_1: R4.1 R5.2 | length 157.8
  Top Layer w6: R4.1 R5.2@379,219
  Top Layer w15: R5.2@379,219 R5.2
PB: J6.9 R10.1 SW1.4 | length 466
  Top Layer w6: R10.1 2092,1352.87 SW1.4 2094.98,1360 J6.9
SCL: J6.1 J8.3 R7.2 U2.10 U3.5 | length 4619.5
  Top Layer w6: U2.10 905.63,3239.37 915,3230 915,2878.12 1003.12,2790 1286.49,2790 1290,2793.51 1290,3350 1340,3400 1870,3400 1880,3390 1880,3200 ; U3.5 1880,3200 ; R7.2 2331,2229 J6.1 2653,2160 2673,2180 2673,2545 2681,2553 J8.3 2097,3200 1880,3200
SDA: J6.2 J8.4 R9.2 U2.9 U3.4 | length 5000
  Top Layer w6: U2.9 875.32,3219.69 885,3210 885,2865 995,2755 1775,2755 1942.78,2587.22 2083.71,2587.22 2087.22,2590.74 2087.22,3152.78 ; U3.4 2077.4,3162.6 2087.22,3152.78 ; R9.2 2159,2060 J6.2 2819,2060 2828,2069 2828,2636 2811,2653 J8.4 2732.85,2653 2710.85,2675 v1(2665,2675) ; v1(2595,2645) 2087.22,3152.78
  Bottom Layer w6: v1(2595,2645) 2635,2645 v1(2665,2675)
SMART_LED_IN: J7.4 R3.2 | length 1559.6
  Top Layer w6: R3.2 1957.49,1602 1961,1598.49 1961,1257.12 2176.12,1042 2312.49,1042 2316,1045.51 2316,1144 2332,1160 2460.49,1160 2464,1156.49 2464,863.57 J7.4
TEMP_DATA: J2.2 J7.6 | length 370.4
  Top Layer w6: J2.2 2145.68,598.68 J7.6
TRIG: J7.2 J11.2 | length 1364.8
  Top Layer w6: J11.2 1677.19,552.19 1677.19,875.5 1847.7,1046 2069.1,1046 2116.41,998.68 J7.2
VCC_5V: A1.1 C1.1 C2.1 C3.1 C5.2 D1.1 D2.1 D3.1 D4.1 D5.1 D6.1 J1.1 J2.1 J3.1 J5.5 J8.5 J9.5 J10.5 J11.1 LED1.2 LED2.2 LED3.2 R5.1 R7.1 R9.1 SW1.1 TP2_VCC.1 U1.1 U2.8 U3.3 | length 17092.8
  Top Layer w6: 628,3204 632,3200 U2.8
  Top Layer w20: R5.1 765,217 J1.1 ; 628,3204 621,3211 621,3324.5 646.5,3350 ; D3.1 700,2688.28 ; D4.1 1014,2641 964.97,2690.03 955,2700 ; D1.1 1127.75,1967 1114,1953.25 1114,1946 1070,1902 1070,1400 ; v1(1264.5,2931.5) 1001,3195 LED2.2 995,3197 995,3408.28 983.28,3420 702.39,3420 691,3408.61 691,3363.5 C2.1 646.5,3350 ; v1(1325,2910) 1532.5,2910 1642.5,3020 C3.1 ; D5.1 1320,2567.5 1320,2688.28 1308.28,2700 ; A1.1 1400.5,1899.5 1400.5,1623 1177.5,1400 1070,1400 ; C5.2 1401,1623.5 1413,1611.5 1426.5,1611.5 1564.94,1473.06 SW1.1 ; D2.1 1535.25,1964.5 1633.75,2063 R9.1 2038.5,2063.5 2038.5,2439.03 1837.53,2640 1732.75,2640 1651.25,2558.5 D6.1 1644,2688.28 1632.28,2700 1308.28,2700 ; U3.3 1654.92,3021.08 C3.1 ; LED1.2 C3.1 ; J8.5 2825.28,2753 2870,2708.28 2870,1994 J10.5 2840.28,1868 2859,1849.28 2859,959 J9.5 2797,703 2797,327.43 2785.28,315.72 2162,315.72 2162,317 J2.1 2063,326.72 2048.28,312 1493,312 J11.1 1413,392 944,392 J1.1 ; C1.1 468,2603 555,2690 698.28,2690 700,2688.28 ; C1.1 358,1916 175,1733 LED3.2 170,1732 TP2_VCC.1 423,1477 J5.5 1070,1400 ; C1.1 358.8,2603.8 358.8,2789.67 U1.1 359.6,2803.26 145.86,3017 J3.1 88,3074 88,3338.28 99.72,3350 646.5,3350 ; 700,2688.28 711.72,2700 955,2700 ; J1.1 1070,522 1070,1400 ; 955,2700 1308.28,2700
  Bottom Layer w20: v1(1264.5,2931.5) 1265.46,2930.54 1303.1,2930.54 1323.65,2910 v1(1325,2910)
pads on no net: D1.2 D3.2 J1.3 J4.4 J4.5 J4.6 J5.1 J5.2 J5.3 J5.4 J5.8 J6.3 J6.4 J6.10 J8.1 J8.2 J9.1 J9.6 SW1.2 SW1.3 U2.2

## Polygon pours and split planes (outlines as drawn)
GND on Int1 (GND) (split plane): 2979.9,20.1 20.1,20.1 20.1,3479.9 2979.9,3479.9
GND on Int2 (GND) (split plane): 2979.9,20.1 20.1,20.1 20.1,3479.9 2979.9,3479.9

## Keep-outs
Keep-Out Layer:
  the board outline again, w20

## Silkscreen, mask and mechanical layers (free items; w line width, h text height)
Top Overlay:
  text "DAC" at 1590,3380 h60
  text "ECEN 5730" at 1935,3345 h60
  text "Arduino Uno Sensor" at 1930,3245 h60
  text "SHIELD" at 2340,3140 h60
  text "ADC" at 520,3015 h60
  text "V G S" at 280,2970 h60 r90
  text "TEMP6000" at 335,2950 h40 r90
  text "Hall Effect" at 485,2755 h40
  text "CU Boulder" at 140,2300 h60 r90
  text "Strip LED's" at 1510,2268.33 h40
  text "RTC" at 2660,2210 h60
  text "DS3231" at 2610,2125 h60
  text "Taher Ujjainwala" at 385,2123.33 h55
  text "Heartbeat" at 1040,1665 h40 r90
  text "Push Button" at 1350,1355 h40
  text "SD Card" at 2530,1325 h60
  text "Buzzer" at 1195,825 h60 r90
  text "V G D A" at 865,380 h50 r90
  text "V  D  G" at 1985,380 h40 r90
  text "Microphone" at 111.67,345 h40 r90
  text "V Trig Echo G" at 1385,295 h30
  text "Gas Sensor MQ7" at 720,280 h40
  text "Bluetooth" at 2545,240 h40
  text "DHT11/22" at 1930,220 h50
  text "Ultrasonic Sensor" at 1260,150 h40
  text "HC-05" at 2560,150 h60
  text "brd4_04_01_2022" at 345,75 h60
  text "TSU" at 1980,75 h60

## Text inside footprints (layer, text, board x,y; h text height)
J4: Top Overlay "A5" at 570,390 h30; Top Overlay "A4" at 565,485 h30; Top Overlay "A3" at 575,585 h30; Top Overlay "A2_MQ7" at 575,685 h30; Top Overlay "A0_DAC" at 570,880 h30; Top Overlay "A1_MIC" at 570,790 h30
J5: Top Overlay "Vin" at 570,1090 h30; Top Overlay "GND" at 565,1185 h30 r358; Top Overlay "GND" at 565,1280 h30; Top Overlay "5v" at 570,1380 h30; Top Overlay "3v3" at 565,1480 h30 r357.85; Top Overlay "RESET" at 565,1585 h30; Top Overlay "NC" at 570,1685 h30; Top Overlay "NC" at 575,1790 h30
J6: Top Overlay "8" at 2300,1245 h30 r357.8; Top Overlay "PB9~" at 2230,1340 h30 r358.56; Top Overlay "SS10~" at 2200,1445 h30; Top Overlay "MOSI11~" at 2160,1545 h30 r358.73; Top Overlay "MISO12" at 2170,1650 h30 r358.49; Top Overlay "SCK13" at 2190,1745 h30 r358.45; Top Overlay "GND" at 2250,1845 h30 r358.56; Top Overlay "AREF" at 2225,1945 h30 r358.87; Top Overlay "SDA" at 2245,2045 h30 r1.07; Top Overlay "SCL" at 2245,2145 h30 r358.83
J7: Top Overlay "A_RX0" at 2195,375 h30; Top Overlay "A_TX1" at 2200,480 h30; Top Overlay "DHT2" at 2220,575 h30; Top Overlay "AD_LED3" at 2140,685 h30; Top Overlay "HB4" at 2240,780 h30; Top Overlay "BUZ5" at 2220,880 h30 r358.45; Top Overlay "TRIG6" at 2195,980 h30; Top Overlay "ECHO7" at 2200,1075 h30
J8: Top Overlay "GND" at 2595,2835 h30; Top Overlay "VCC" at 2595,2735 h30; Top Overlay "SDA" at 2590,2635 h30; Top Overlay "SCL" at 2600,2535 h30; Top Overlay "NC" at 2610,2335 h30; Top Overlay "NC" at 2610,2440 h30
J9: Top Overlay "NC" at 2585,880 h30; Top Overlay "VCC" at 2555,785 h30; Top Overlay "GND" at 2555,685 h30; Top Overlay "BT_TX" at 2495,580 h30; Top Overlay "NC" at 2585,385 h30; Top Overlay "BT_RX" at 2500,475 h30
J10: Top Overlay "SCK" at 2590,1555 h30; Top Overlay "SS" at 2615,1450 h30; Top Overlay "MOSI" at 2575,1655 h30; Top Overlay "MISO" at 2565,1755 h30; Top Overlay "VCC" at 2590,1855 h30; Top Overlay "GND" at 2590,1950 h30
MK1: Top Overlay "+" at 320.92,858.24 h50 r180; Top Overlay "-" at 100.45,858.24 h50 r180; Mechanical 13 "+" at 320.92,858.24 h50 r180; Mechanical 13 "-" at 100.45,858.24 h50 r180